# Altium PCB Quadrotor.PcbDoc
Units mil, origin at the board's own origin, x right, y up, seen from the top; angles counter-clockwise.
Board outline 3300.89 x 3300.89 mil, 2 copper layers (Top Layer, Bottom Layer); 82 components, 73 nets, 358 pads, 124 vias.
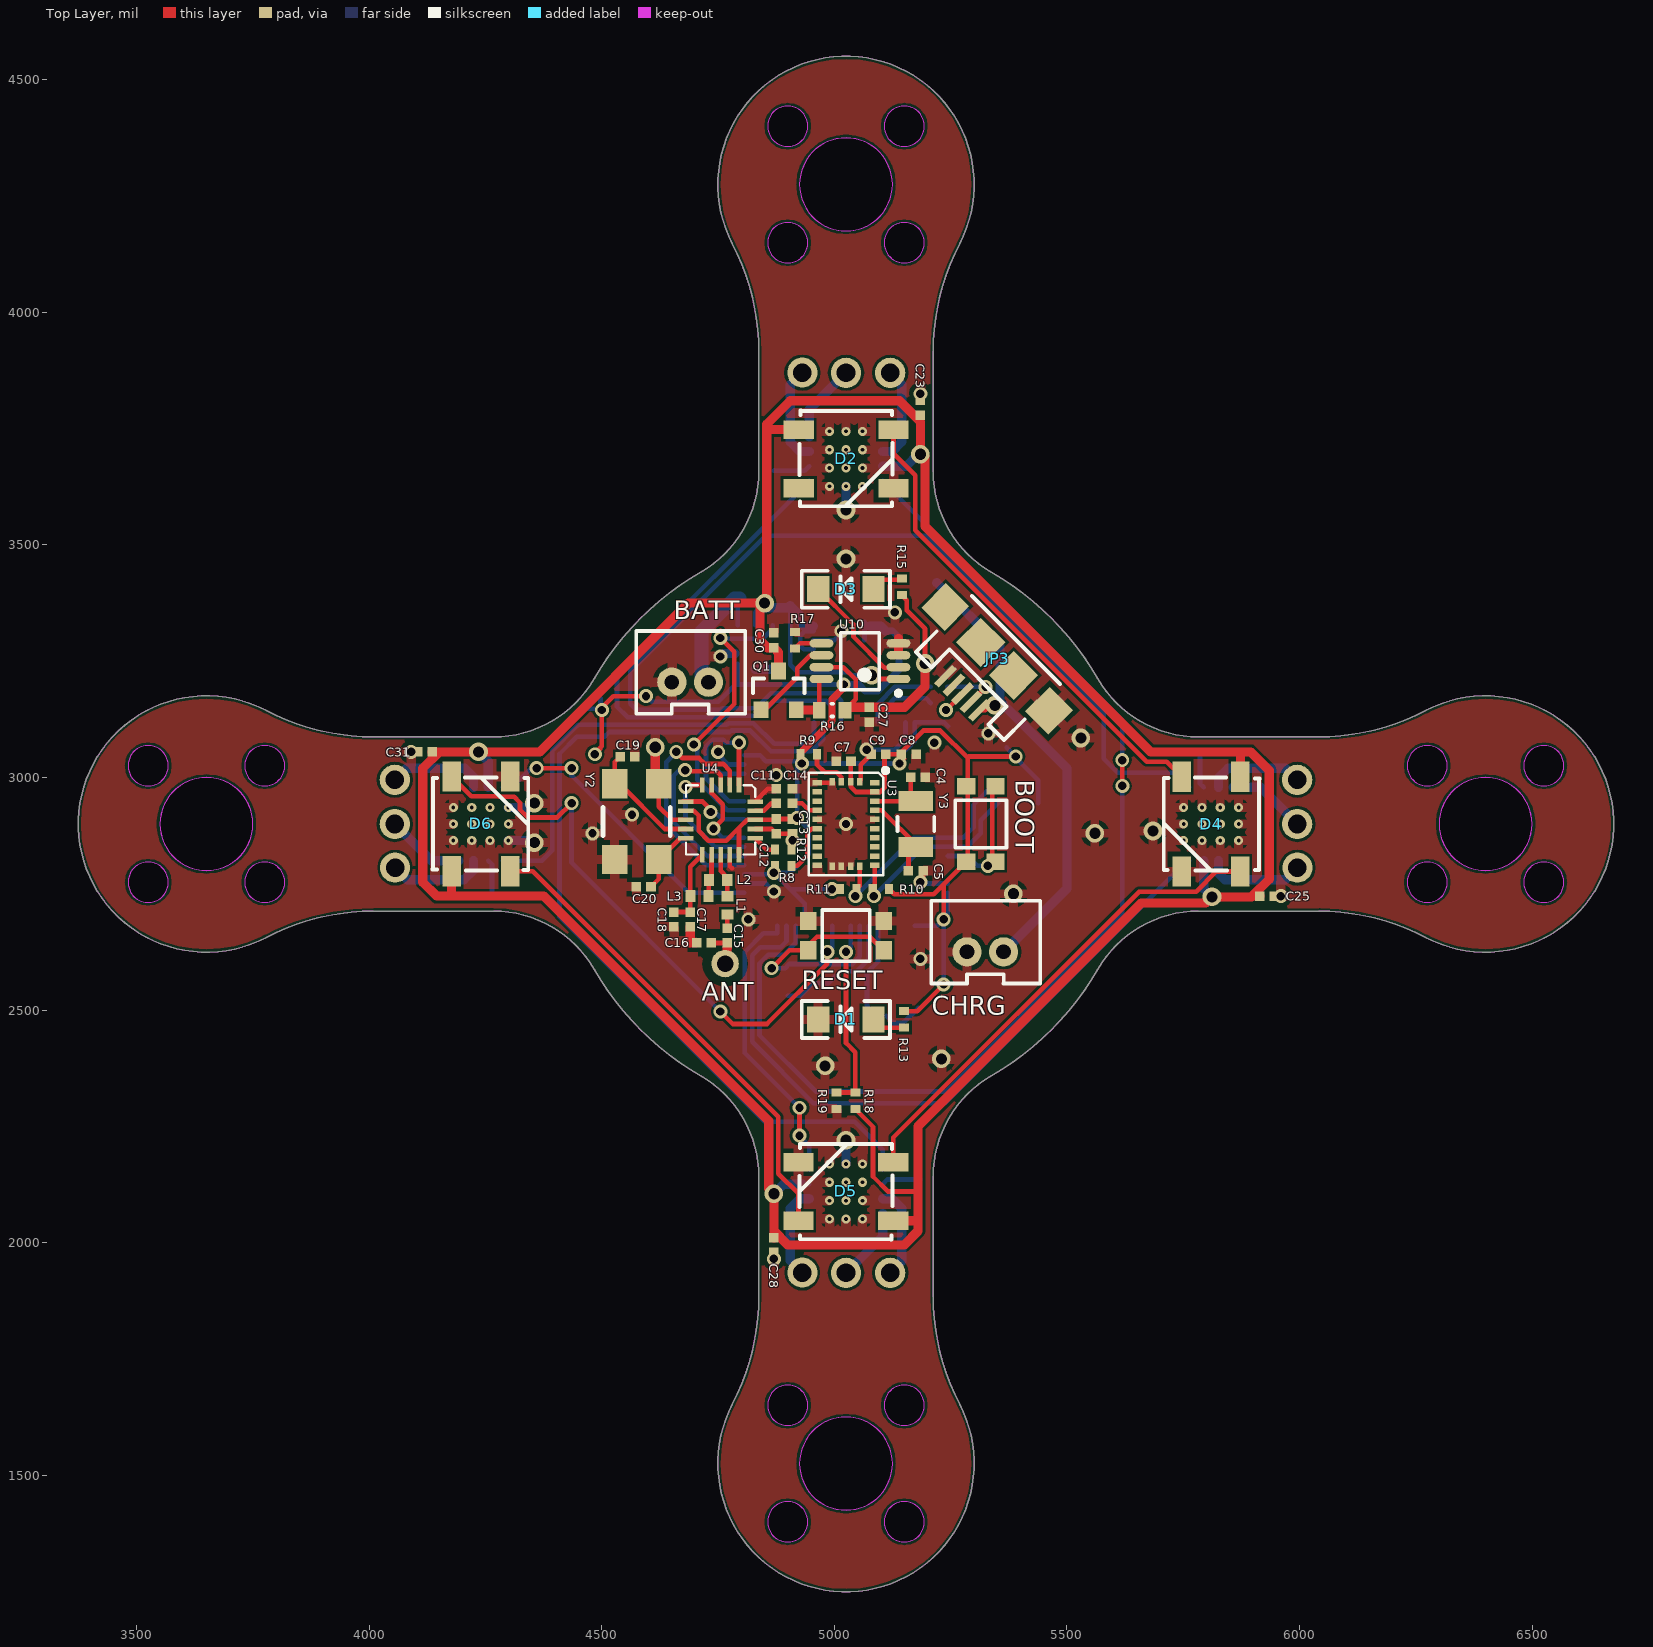
[diagram p0: Top Layer view]
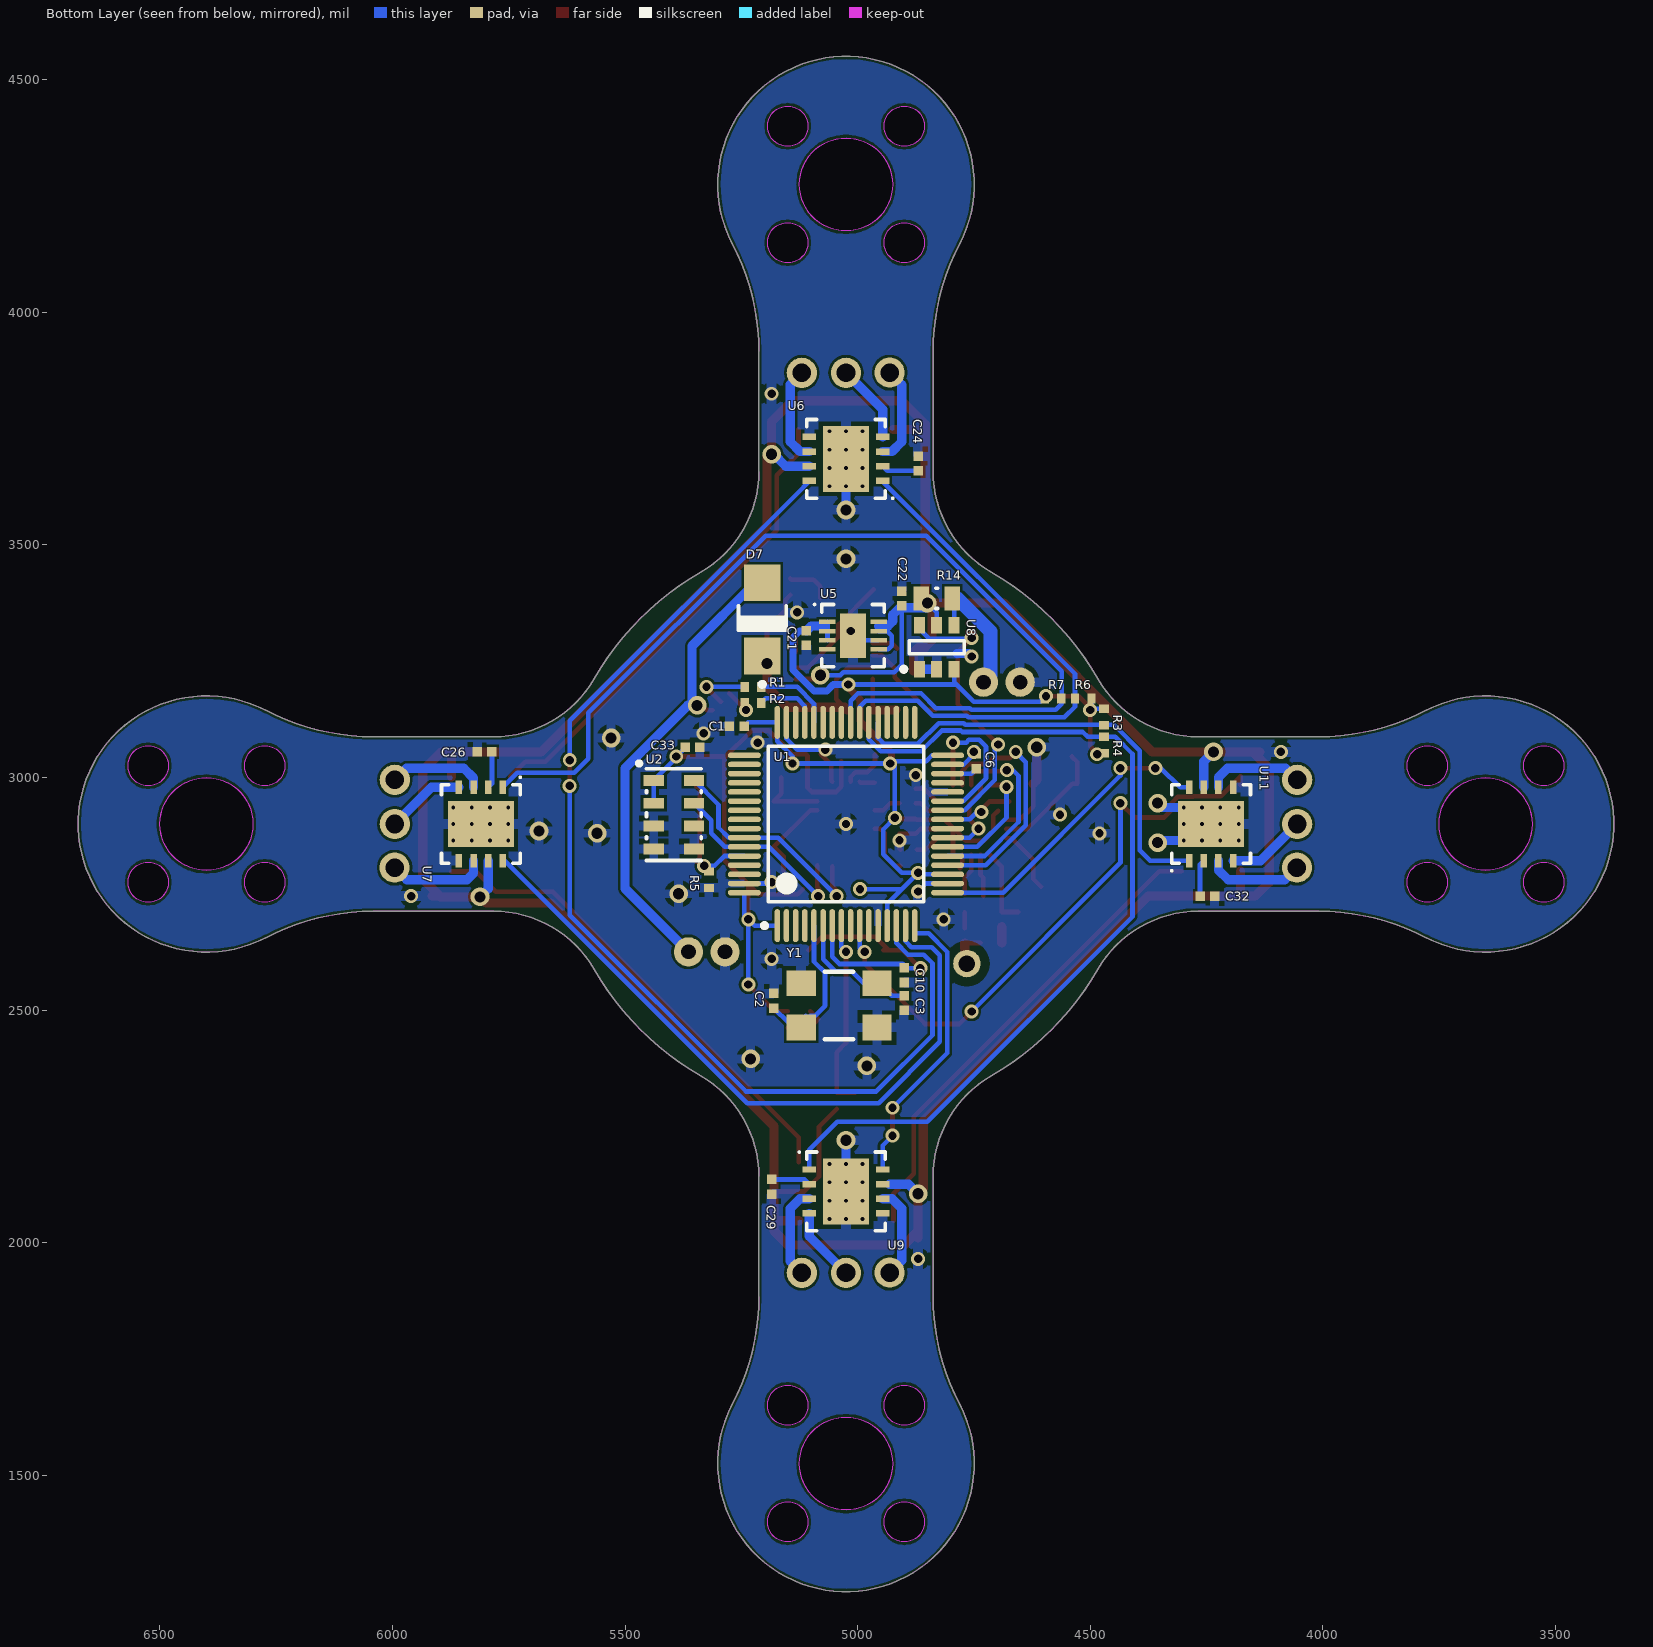
[diagram p1: Bottom Layer view, seen from below]

## Layer stack, top to bottom
Top Solder: solder mask 0.4, Solder Resist, Dk 3.5
Top Layer: signal copper 1.4
Dielectric 1: dielectric 12.6, FR-4, Dk 4.8
Bottom Layer: signal copper 1.4
Bottom Solder: solder mask 0.4, Solder Resist, Dk 3.5

## Board outline
4267.23,2712.5 cw(c4267.23,2462.5) 4483.73,2587.5 ccw(c5025,2900) 4712.5,2358.73 cw(c4587.5,2142.23) 4837.5,2142.23 4837.5,1884 cw(c4337.5,1884) 4780.71,1652.57 ccw(c5025,1525) 5269.29,1652.57 cw(c5712.5,1884) 5212.5,1884 5212.5,2142.23 cw(c5462.5,2142.23) 5337.5,2358.73 ccw(c5025,2900) 5566.27,2587.5 cw(c5782.77,2462.5) 5782.77,2712.5 6041,2712.5 cw(c6041,2212.5) 6272.43,2655.71 ccw(c6400,2900) 6272.43,3144.29 cw(c6041,3587.5) 6041,3087.5 5782.77,3087.5 cw(c5782.77,3337.5) 5566.27,3212.5 ccw(c5025,2900) 5337.5,3441.27 cw(c5462.5,3657.77) 5212.5,3657.77 5212.5,3916 cw(c5712.5,3916) 5269.29,4147.43 ccw(c5025,4275) 4780.71,4147.43 cw(c4337.5,3916) 4837.5,3916 4837.5,3657.77 cw(c4587.5,3657.77) 4712.5,3441.27 ccw(c5025,2900) 4483.73,3212.5 cw(c4267.23,3337.5) 4267.23,3087.5 4009,3087.5 cw(c4009,3587.5) 3777.57,3144.29 ccw(c3650,2900) 3777.57,2655.71 cw(c4009,2212.5) 4009,2712.5
cut-out: 3550,2900 ccw(c3650,2900) 3650,2800 ccw(c3650,2900) 3750,2900 ccw(c3650,2900) 3650,3000 ccw(c3650,2900)
cut-out: 3731.97,2774.73 ccw(c3775.27,2774.73) 3775.27,2731.42 ccw(c3775.27,2774.73) 3818.58,2774.73 ccw(c3775.27,2774.73) 3775.27,2818.03 ccw(c3775.27,2774.73)
cut-out: 3481.42,2774.73 ccw(c3524.73,2774.73) 3524.73,2731.42 ccw(c3524.73,2774.73) 3568.03,2774.73 ccw(c3524.73,2774.73) 3524.73,2818.03 ccw(c3524.73,2774.73)
cut-out: 3731.97,3025.27 ccw(c3775.27,3025.27) 3775.27,2981.97 ccw(c3775.27,3025.27) 3818.58,3025.27 ccw(c3775.27,3025.27) 3775.27,3068.58 ccw(c3775.27,3025.27)
cut-out: 3481.42,3025.27 ccw(c3524.73,3025.27) 3524.73,2981.97 ccw(c3524.73,3025.27) 3568.03,3025.27 ccw(c3524.73,3025.27) 3524.73,3068.58 ccw(c3524.73,3025.27)
cut-out: 4925,1525 ccw(c5025,1525) 5025,1425 ccw(c5025,1525) 5125,1525 ccw(c5025,1525) 5025,1625 ccw(c5025,1525)
cut-out: 4856.42,1399.73 ccw(c4899.73,1399.73) 4899.73,1356.42 ccw(c4899.73,1399.73) 4943.03,1399.73 ccw(c4899.73,1399.73) 4899.73,1443.03 ccw(c4899.73,1399.73)
cut-out: 5106.97,1399.73 ccw(c5150.27,1399.73) 5150.27,1356.42 ccw(c5150.27,1399.73) 5193.58,1399.73 ccw(c5150.27,1399.73) 5150.27,1443.03 ccw(c5150.27,1399.73)
cut-out: 4856.42,1650.27 ccw(c4899.73,1650.27) 4899.73,1606.97 ccw(c4899.73,1650.27) 4943.03,1650.27 ccw(c4899.73,1650.27) 4899.73,1693.58 ccw(c4899.73,1650.27)
cut-out: 5106.97,1650.27 ccw(c5150.27,1650.27) 5150.27,1606.97 ccw(c5150.27,1650.27) 5193.58,1650.27 ccw(c5150.27,1650.27) 5150.27,1693.58 ccw(c5150.27,1650.27)
cut-out: 6300,2900 ccw(c6400,2900) 6400,2800 ccw(c6400,2900) 6500,2900 ccw(c6400,2900) 6400,3000 ccw(c6400,2900)
cut-out: 6231.42,2774.73 ccw(c6274.73,2774.73) 6274.73,2731.42 ccw(c6274.73,2774.73) 6318.03,2774.73 ccw(c6274.73,2774.73) 6274.73,2818.03 ccw(c6274.73,2774.73)
cut-out: 6481.97,2774.73 ccw(c6525.27,2774.73) 6525.27,2731.42 ccw(c6525.27,2774.73) 6568.58,2774.73 ccw(c6525.27,2774.73) 6525.27,2818.03 ccw(c6525.27,2774.73)
cut-out: 6231.42,3025.27 ccw(c6274.73,3025.27) 6274.73,2981.97 ccw(c6274.73,3025.27) 6318.03,3025.27 ccw(c6274.73,3025.27) 6274.73,3068.58 ccw(c6274.73,3025.27)
cut-out: 6481.97,3025.27 ccw(c6525.27,3025.27) 6525.27,2981.97 ccw(c6525.27,3025.27) 6568.58,3025.27 ccw(c6525.27,3025.27) 6525.27,3068.58 ccw(c6525.27,3025.27)
cut-out: 4925,4275 ccw(c5025,4275) 5025,4175 ccw(c5025,4275) 5125,4275 ccw(c5025,4275) 5025,4375 ccw(c5025,4275)
cut-out: 5106.97,4149.73 ccw(c5150.27,4149.73) 5150.27,4106.42 ccw(c5150.27,4149.73) 5193.58,4149.73 ccw(c5150.27,4149.73) 5150.27,4193.03 ccw(c5150.27,4149.73)
cut-out: 4856.42,4149.73 ccw(c4899.73,4149.73) 4899.73,4106.42 ccw(c4899.73,4149.73) 4943.03,4149.73 ccw(c4899.73,4149.73) 4899.73,4193.03 ccw(c4899.73,4149.73)
cut-out: 4856.42,4400.27 ccw(c4899.73,4400.27) 4899.73,4356.97 ccw(c4899.73,4400.27) 4943.03,4400.27 ccw(c4899.73,4400.27) 4899.73,4443.58 ccw(c4899.73,4400.27)
cut-out: 5106.97,4400.27 ccw(c5150.27,4400.27) 5150.27,4356.97 ccw(c5150.27,4400.27) 5193.58,4400.27 ccw(c5150.27,4400.27) 5150.27,4443.58 ccw(c5150.27,4400.27)

## Design rules (kind name [scope] priority, off if disabled: settings)
Clearance Clearance_2 [InNet('ANTENNA') vs (InNet('GND') AND InPolygon)] p1: gap=19.68
Clearance Clearance_1 [All] p2: gap=5.91
Clearance [InPolygon] p3: gap=7.87
PolygonConnect [All] p1: connectstyle=Relief reliefconductorwidth=20 reliefentries=4 polygonreliefangle="90 Angle" airgapwidth=10
RoutingVias [All] p1: holewidth=24 width=40 viastyle="Through Hole" minholewidth=18 minwidth=30 maxholewidth=28 maxwidth=50
SolderMaskExpansion [All] p1: expansion=4
Width [All] p1: maxlimit=50 minlimit=10 preferedwidth=10 minimp=50.000000 maximp=50.000000 favimp=50.000000
30 further rules are at their usual default settings.

## Classes and differential pairs
component class Quadrotor: BATT CHRG JP3
component class U_Logic: C1 C2 C3 C4 C5 C6 C7 C8 C9 C10 C11 C12 C13 C14 C15 C16 C17 C18 C19 C20 C33 D2 D4 D5 D6 L1 L2 L3 R1 R2 R3 R4 R5 R6 R7 R8 R9 R10 R11 R12 R18 R19 SW1 SW2 U1 U2 U3 U4 Y1 Y2 Y3
component class U_Power: C21 C22 C23 C24 C25 C26 C27 C28 C29 C30 C31 C32 D1 D3 D7 Q1 R13 R14 R15 R16 R17 U5 U6 U7 U8 U9 U10 U11

## Components (designator, comment, footprint, x,y, rotation, side; value= is the part's Value field where it differs from the comment)
BATT "" JST-2-PTH-VERT 4690,3205 r0 top (schematic designator JP1)
BOOT "" SWITCH 5315,2900 r270 top (schematic designator SW1)
C1 "4.7uF" CAPC0402(1005)60_L 5260,3110 r180 bottom
C2 "15pF" CAPC0402(1005)60_L 5180,2520 r90 bottom
C3 "15pF" CAPC0402(1005)60_L 4900,2515 r270 bottom
C4 "22pF" CAPC0402(1005)60_L 5180,3000 r180 top
C5 "22pF" CAPC0402(1005)60_L 5175,2800 r180 top
C6 "4.7uF" CAPC0402(1005)60_L 4745,3035 r270 bottom
C7 "100nF" CAPC0402(1005)60_L 5020,3035 r0 top
C8 "120nF" CAPC0402(1005)60_L 5160,3050 r180 top
C9 "6.8nF" CAPC0402(1005)60_L 5095,3050 r0 top
C10 "100nF" CAPC0402(1005)60_L 4900,2575 r90 bottom
C11 "33nF" CAPC0402(1005)60_L 4875,2960 r270 top
C12 "10nF" CAPC0402(1005)60_L 4875,2895 r90 top
C13 "1nF" CAPC0402(1005)60_L 4910,2895 r90 top
C14 "100nF" CAPC0402(1005)60_L 4910,2960 r270 top
C15 "1.5pF" CAPC0402(1005)60_L 4770,2660 r270 top
C16 "1pF" CAPC0402(1005)60_L 4720,2645 r0 top
C17 "2.2nF" CAPC0402(1005)60_L 4690,2695 r90 top
C18 "4.7pF" CAPC0402(1005)60_L 4655,2695 r90 top
C19 "15pF" CAPC0402(1005)60_L 4555,3045 r180 top
C20 "15pF" CAPC0402(1005)60_L 4590,2765 r0 top
C21 "4.7uF" CAPC0402(1005)60_L 5110,3300 r90 bottom
C22 "4.7uF" CAPC0402(1005)60_L 4905,3385 r270 bottom
C23 "4.7uF" CAPC0402(1005)60_L 5185,3795 r270 top
C24 "4.7uF" CAPC0402(1005)60_L 4870,3675 r90 bottom
C25 "4.7uF" CAPC0402(1005)60_L 5930,2745 r180 top
C26 "4.7uF" CAPC0402(1005)60_L 5801.89,3055.65 r0 bottom
C27 "2.2uF" CAPC0402(1005)60_L 5075,3135 r90 top
C28 "4.7uF" CAPC0402(1005)60_L 4870,1995 r90 top
C29 "4.7uF" CAPC0402(1005)60_L 5185,2120 r270 bottom
C30 "10uF" CAPC0402(1005)60_L 4870,3295 r270 top
C31 "4.7uF" CAPC0402(1005)60_L 4120,3055 r0 top
C32 "4.7uF" CAPC0402(1005)60_L 4248.11,2744.35 r180 bottom
C33 "0.1uF" CAPC0402(1005)60_L 5355,3065 r0 bottom
CHRG "" JST-2-PTH-VERT 5324.37,2625 r0 top (schematic designator JP2)
D1 "LED-BLUE" LED-1206 5025,2480 r180 top
D2 "WS2812B" WS2812B 5025,3685 r0 top
D3 "LED-GREEN" LED-1206 5025,3405 r180 top
D4 "WS2812B" WS2812B 5810,2900 r270 top
D5 "WS2812B" WS2812B 5025,2110 r180 top
D6 "WS2812B" WS2812B 4240,2900 r90 top
D7 "MBRA210LT3G" ONSC-SMA-2-403D-02_F_V 5205,3340 r90 bottom
JP3 "USB" USB-MICROB 5350,3255 r135 top
L1 "3.9nH" INDC0402(1005)_N 4770,2725 r270 top
L2 "8.2nH" INDC0402(1005)_N 4750,2780 r180 top
L3 "2.7nH" INDC0402(1005)_N 4710,2745 r180 top
Q1 "MOSFET-P" SOT23-3 4880,3185 r0 top
R1 "22R" RESC0402(1005)_L 5225,3195 r180 bottom
R2 "22R" RESC0402(1005)_L 5225,3160 r180 bottom
R3 "10K" RESC0402(1005)_L 4470,3130 r90 bottom
R4 "10K" RESC0402(1005)_L 4470,3070 r270 bottom
R5 "10K" RESC0402(1005)_L 5320,2780 r90 bottom
R6 "10K" RESC0402(1005)_L 4515,3170 r0 bottom
R7 "10K" RESC0402(1005)_L 4580,3170 r180 bottom
R8 "10K" RESC0402(1005)_L 4890,2810 r180 top
R9 "10K" RESC0402(1005)_L 4945,3050 r180 top
R10 "10K" RESC0402(1005)_L 5100,2760 r180 top
R11 "10K" RESC0402(1005)_L 5030,2760 r0 top
R12 "22K" RESC0402(1005)_L 4890,2845 r180 top
R13 "10R" RESC0402(1005)_L 5150,2480 r90 top
R14 "0.006R" RESC0805(2012)_L 4830,3385 r180 bottom
R15 "91R" RESC0402(1005)_L 5145,3410 r270 top
R16 "0.1R" RESC0603(1608)_L 4995,3145 r0 top
R17 "19K6" RESC0402(1005)_L 4915,3295 r270 top
R18 "5K1" RESC0402(1005)_L 5045,2305 r270 top
R19 "10K" RESC0402(1005)_L 5005,2305 r90 top
RESET "" SWITCH 5025,2660 r180 top (schematic designator SW2)
U1 "STMF446" STM-LQFP64_N 5025,2900 r90 bottom
U2 "MS5611" MS5611 5395,2920 r180 bottom
U3 "BNO055" LGA28R50P4X10_380X520X100 5025,2900 r270 top
U4 "" QFN20 4755,2910 r270 top
U5 "ADM7171" SON50P300X85_HS-9N 5010,3305 r180 bottom
U6 "MCP8063" DFN8 5025,3685 r0 bottom
U7 "MCP8063" DFN8 5810,2900 r270 bottom
U8 "MAX4173" MAXM-U6+1_L 4830,3280 r90 bottom
U9 "MCP8063" DFN8 5025,2110 r180 bottom
U10 "LTC1731" LT-MS8-8_L 5055,3250 r180 top
U11 "MCP8063" DFN8 4240,2900 r90 bottom
Y1 "" ABRA-ABM3B-4_V 5040,2510 r180 bottom
Y2 "" ABRA-ABM3B-4_V 4575,2905 r270 top
Y3 "ABS07" ABS07 5175,2900 r270 top

## Footprints (in the part's own frame and the unit in brackets; to place one, negate y for a bottom-side part, rotate by r counter-clockwise, add the part's x,y. Pads: shape width x height; smd on the part's side, far side on the other; paste and mask are expansions set on the pad)
ABRA-ABM3B-4_V [mil] "SMT Crystal, 4-Leads, Body 5.2x3.4mm"
  rect 63x55 smd: 1(-81.5,-47.5) 2(-81.5,47.5) 2(81.5,-47.5) 3(81.5,47.5)
  silkscreen extent -31,-72 31,72, body extent -114,-52 113,51, height 39
ABS07 [mm]
  rect 1.1x1.9 smd: 1(-1.25,0) 2(1.25,0)
  silkscreen extent -0.4,-1 0.4,1
CAPC0402(1005)60_L [mm] "Chip Capacitor, Body 1.0x0.5mm, Height 0.6mm, IPC High Density"
  rect 0.52x0.52 smd: 1(-0.4,0) 2(0.4,0)
  body extent -0.55,-0.3 0.55,0.3, height 0.6
DFN8 [mm] "SON, 8-Leads, Body 4.00x4.00mm, Pitch 0.80mm, Thermal Pad 3.50x2.58mm, IPC Medium Density"
  rect 0.75x0.35 smd: 1(-2,1.2) 2(-2,0.4) 3(-2,-0.4) 4(-2,-1.2) 5(2,-1.2) 6(2,-0.4) 7(2,0.4) 8(2,1.2)
  rect 2.5x3.6 smd paste-1.29: 9(0,0)
  silkscreen extent -2.6,-2.15 2.15,2.2, body extent -2,-2 2,2, height 0.85
INDC0402(1005)_N [mm] "Chip Inductor Body 1.0x0.5mm, IPC Medium Density"
  rect 0.55x0.65 smd: 1(-0.5,0) 2(0.5,0)
  body extent -0.52,-0.27 0.53,0.28, height 0.4
JST-2-PTH-VERT [mil]
  round 63 hole 31.5: 1(-39.37,0) 2(39.37,0)
  silkscreen extent -116,-68 118,110, body extent -116,-67 116,110, height 236
LED-1206 [mil]
  rect 48x56 smd: A(-59.06,0) C(60,0)
  silkscreen extent -94,-39 95,40, body extent -63,-31 63,31, height 43
LGA28R50P4X10_380X520X100 [mm]
  rect 0.3x0.525 smd mask+0.076: 1(-2.25,1.562) 6(-2.25,-1.562) 7(-1.75,-1.562) 8(-1.25,-1.562) 9(-0.75,-1.562) 10(-0.25,-1.562) 11(0.25,-1.562) 12(0.75,-1.562) 13(1.25,-1.562) 14(1.75,-1.562) 15(2.25,-1.562) 20(2.25,1.562) 21(1.75,1.562) 22(1.25,1.562) 23(0.75,1.562) 24(0.25,1.562) 25(-0.25,1.562) 26(-0.75,1.562) 27(-1.25,1.562) 28(-1.75,1.562)
  rect 0.425x0.3 smd mask+0.076: 2(-2.312,0.75) 3(-2.312,0.25) 4(-2.312,-0.25) 5(-2.312,-0.75) 16(2.312,-0.75) 17(2.312,-0.25) 18(2.312,0.25) 19(2.312,0.75)
  silkscreen extent -3.02,-2.03 2.79,2.26, body extent -2.5,-1.8 2.5,1.8, height 0.6
LT-MS8-8_L [mm] "SOP, 8-Leads, Body 3.1x3.1mm, Pitch 0.65mm, IPC High Density"
  oval 1.3x0.45 smd: 1(-2.1,0.975) 2(-2.1,0.325) 3(-2.1,-0.325) 4(-2.1,-0.975) 5(2.1,-0.975) 6(2.1,-0.325) 7(2.1,0.325) 8(2.1,0.975)
  silkscreen extent -2.23,-1.55 1.05,1.87, body extent -1.55,-1.55 1.55,1.55, height 1.1
MAXM-U6+1_L [mm] "SOT23, 6-Leads, Body 2.9x1.625mm, Pitch 0.95mm, IPC High Density"
  rect 0.9x0.6 smd: 1(-1.2,0.95) 2(-1.2,0) 3(-1.2,-0.95) 4(1.2,-0.95) 5(1.2,0) 6(1.2,0.95)
  silkscreen extent -1.32,-1.5 0.35,1.93, body extent -0.87,-1.5 0.87,1.5, height 1.45
MS5611 [mm]
  rect 1.1x0.6 smd: 1(-1.1,1.875) 2(-1.1,0.625) 3(-1.1,-0.625) 4(-1.1,-1.875) 5(1.1,-1.875) 6(1.1,-0.625) 7(1.1,0.625) 8(1.1,1.875)
  silkscreen extent -2,-2.5 1.5,2.9
ONSC-SMA-2-403D-02_F_V [mm] "Molded, 2-Leads, Body 4.32x2.6mm"
  rect 2x2 smd: 1(-2,0) 2(2,0)
  silkscreen extent -3.67,-1.3 0.74,1.3, body extent -2.16,-1.3 2.16,1.3, height 2.2
QFN20 [mm]
  rect 0.84x0.25 smd: 1(-1.876,1.016) 2(-1.876,0.516) 3(-1.876,0.016) 4(-1.876,-0.484) 5(-1.876,-0.984) 11(1.931,-0.984) 12(1.931,-0.484) 13(1.931,0.016) 14(1.931,0.516) 15(1.931,1.016)
  rect 0.25x0.84 smd: 6(-0.972,-1.887) 7(-0.472,-1.887) 8(0.028,-1.887) 9(0.528,-1.887) 10(1.028,-1.887) 16(1.028,1.894) 17(0.528,1.894) 18(0.028,1.894) 19(-0.472,1.894) 20(-0.972,1.894)
  Top Layer lines w0.254: -0.972,-2.039 -0.972,-1.887
  silkscreen extent -1.87,-1.88 1.92,1.91, body extent -1.5,-1.5 1.5,1.5, height 0.62
RESC0402(1005)_L [mm] "Chip Resistor, Body 1.0x0.5mm, IPC High Density"
  rect 0.45x0.55 smd: 1(-0.45,0) 2(0.45,0)
  body extent -0.52,-0.27 0.53,0.28, height 0.4
RESC0603(1608)_L [mm] "Chip Resistor, Body 1.6x0.8mm, IPC High Density"
  rect 0.7x0.9 smd: 1(-0.7,0) 2(0.7,0)
  silkscreen extent -0.05,-0.35 0.05,0.35, body extent -0.85,-0.47 0.85,0.47, height 0.6
RESC0805(2012)_L [mm] "Chip Resistor, Body 2.0x1.3mm, IPC High Density"
  rect 0.85x1.3 smd: 1(-0.85,0) 2(0.85,0)
  silkscreen extent -0.05,-0.55 0.05,0.55, body extent -1.1,-0.67 1.1,0.68, height 0.7
SON50P300X85_HS-9N [mm] "SON, 8-Leads, Body 3.00x3.00mm, Pitch 0.50mm, Thermal Pad 2.44x1.49mm, IPC Medium Density"
  rect 0.9x0.25 smd: 1(-1.395,0.75) 2(-1.395,0.25) 3(-1.395,-0.25) 4(-1.395,-0.75) 5(1.395,-0.75) 6(1.395,-0.25) 7(1.395,0.25) 8(1.395,0.75)
  rect 1.4x2.44 smd: 9(0,0)
  silkscreen extent -2.15,-1.7 1.7,1.75, body extent -1.55,-1.55 1.55,1.55, height 0.85
SOT23-3 [mil]
  rect 32x36 smd: 1(-37.4,-39.37) 2(0,44) 3(38,-39.37)
  silkscreen extent -55,-4 56,28
STM-LQFP64_N [mm] "Thin QFP, 64-Leads, Body 10x10mm, Pitch 0.5mm, IPC Medium Density"
  oval 1.8x0.3 smd: 1(-5.55,3.75) 2(-5.55,3.25) 3(-5.55,2.75) 4(-5.55,2.25) 5(-5.55,1.75) 6(-5.55,1.25) 7(-5.55,0.75) 8(-5.55,0.25) 9(-5.55,-0.25) 10(-5.55,-0.75) 11(-5.55,-1.25) 12(-5.55,-1.75) 13(-5.55,-2.25) 14(-5.55,-2.75) 15(-5.55,-3.25) 16(-5.55,-3.75) 33(5.55,-3.75) 34(5.55,-3.25) 35(5.55,-2.75) 36(5.55,-2.25) 37(5.55,-1.75) 38(5.55,-1.25) 39(5.55,-0.75) 40(5.55,-0.25) 41(5.55,0.25) 42(5.55,0.75) 43(5.55,1.25) 44(5.55,1.75) 45(5.55,2.25) 46(5.55,2.75) 47(5.55,3.25) 48(5.55,3.75)
  oval 0.3x1.8 smd: 17(-3.75,-5.55) 18(-3.25,-5.55) 19(-2.75,-5.55) 20(-2.25,-5.55) 21(-1.75,-5.55) 22(-1.25,-5.55) 23(-0.75,-5.55) 24(-0.25,-5.55) 25(0.25,-5.55) 26(0.75,-5.55) 27(1.25,-5.55) 28(1.75,-5.55) 29(2.25,-5.55) 30(2.75,-5.55) 31(3.25,-5.55) 32(3.75,-5.55) 49(3.75,5.55) 50(3.25,5.55) 51(2.75,5.55) 52(2.25,5.55) 53(1.75,5.55) 54(1.25,5.55) 55(0.75,5.55) 56(0.25,5.55) 57(-0.25,5.55) 58(-0.75,5.55) 59(-1.25,5.55) 60(-1.75,5.55) 61(-2.25,5.55) 62(-2.75,5.55) 63(-3.25,5.55) 64(-3.75,5.55)
  silkscreen extent -5.67,-4.25 4.25,4.58, body extent -6.07,-6.07 6.07,6.07, height 1.62
SWITCH [mm]
  rect 0.9x1 smd: 1(-2.05,0.8) 2(2.05,0.8) 3(-2.05,-0.8) 4(2.05,-0.8)
  silkscreen extent -1.3,-1.4 1.3,1.4, body extent -2.3,-1.4 2.3,1.4, height 1.9
USB-MICROB [mil]
  rect 14x56 smd: D+(0,105) D-(-25.59,105) GND(52,105) ID(26,105) VBUS(-51.18,105)
  rect 71x75 smd: MT1(-157.48,0) MT2(158,0)
  rect 75x75 smd: P$1(-50,0) P$2(50,0)
  silkscreen extent -134,-57 134,113, body extent -156,-80 157,134, height 108
WS2812B [mil]
  rect 65x40 smd: 1(-101.46,63) 2(-101.46,-62.99) 3(102,-62.99) 4(102,63)
  silkscreen extent -100,-102 100,104, body extent -105,-97 105,97, height 59

## Part data
BATT CHRG: library part JST_2_RIGHT
BOOT RESET: library part DIPT-DTSM-6, "Switch, SPNO Push Button SMD"
C1 C6 C21 C22 C23 C24 C25 C26 C28 C29 C31 C32: library part CMP-1034-02136-1, "CAP 4.7uF 6.3V ±10% 0402 (1005 Metric) Thickness 0.6mm SMD"
C2 C3: library part CMP-1034-00804-1, "CAP 15pF 25V ±0.25pF 0402 (1005 Metric) Thickness 0.6mm SMD"
C4 C5: library part CMP-1034-00911-1, "CAP 22pF 25V ±10% 0402 (1005 Metric) Thickness 0.6mm SMD"
C7 C8 C10 C14 C33: library part CMP-1034-02060-1, "CAP 100nF 6.3V ±5% 0402 (1005 Metric) Thickness 0.6mm SMD"
C9: library part CMP-1034-01836-1, "CAP 6.8nF 6.3V ±5% 0402 (1005 Metric) Thickness 0.6mm SMD"
C11: library part CMP-1034-01977-1, "CAP 33nF 6.3V ±10% 0402 (1005 Metric) Thickness 0.6mm SMD"
C12: library part CMP-1034-01867-1, "CAP 10nF 6.3V ±5% 0402 (1005 Metric) Thickness 0.6mm SMD"
C13: library part CMP-1034-01609-1, "CAP 1nF 6.3V ±5% 0402 (1005 Metric) Thickness 0.6mm SMD"
C15: library part CMP-1034-00110-1, "CAP 1.5pF 25V ±0.5pF 0402 (1005 Metric) Thickness 0.6mm SMD"
C16: library part CMP-1034-00055-1, "CAP 1pF 25V ±0.5pF 0402 (1005 Metric) Thickness 0.6mm SMD"
C17: library part CMP-1034-01722-1, "CAP 2.2nF 6.3V ±5% 0402 (1005 Metric) Thickness 0.6mm SMD"
C18: library part CMP-1034-00362-1, "CAP 4.7pF 25V ±0.1pF 0402 (1005 Metric) Thickness 0.6mm SMD"
C19 C20: library part CMP-1034-00809-1, "CAP 15pF 25V ±10% 0402 (1005 Metric) Thickness 0.6mm SMD"
C27: library part CMP-1034-02125-1, "CAP 2.2uF 6.3V ±10% 0402 (1005 Metric) Thickness 0.6mm SMD"
C30: library part CMP-1034-02138-1, "CAP 10uF 6.3V ±20% 0402 (1005 Metric) Thickness 0.6mm SMD"
D1: library part LED-BLUE1206
D3: library part LED-GREEN1206
D7: library part CMP-1055-00309-1, "Schottky Power Rectifier, 2-Pin SMA, Pb-Free, Tape and Reel"
JP3: library part USB_MICROB_PLUG-SMT
L1 L2 L3: library part INDC0402, "Inductor"
Q1: "P-Channel MOSFET"
R1 R2: library part CMP-1011-00034-1, "22R 0.063W 5% 0402 (1005 Metric)  SMD"
R3 R4 R5 R6 R7 R8 R9 R10 R11 R19: library part CMP-1011-00098-1, "10K 0.063W 5% 0402 (1005 Metric)  SMD"
R12: library part CMP-1011-00106-1, "22K 0.063W 5% 0402 (1005 Metric)  SMD"
R13: library part CMP-1011-00026-1, "10R 0.063W 5% 0402 (1005 Metric)  SMD"
R14: library part CMP-1013-00001-1, "Jumper 0805 (2012 Metric)"
R15: library part CMP-1011-00049-1, "91R 0.063W 5% 0402 (1005 Metric)  SMD"
R16: library part CMP-1012-00002-1, "1R 0.1W 5% 0603 (1608 Metric)  SMD"
R17: library part CMP-1011-00105-1, "20K 0.063W 5% 0402 (1005 Metric)  SMD"
R18: library part CMP-1011-00091-1, "5K1 0.063W 5% 0402 (1005 Metric)  SMD"
U1: library part MC-ARM-STM32F4X5-SQ64
U4: library part NRF24L01+
U6 U7 U9 U11: "3-Phase Brushless DC Sinusoidal Sensorless Fan Motor Driver, MOSFET Output, 2 to 14 V, 8-pin SOP (SE8), Tube"
U8: library part CMP-0252-00331-1, "Voltage-Output, High-Side Current-Sense Amplifier, 50 V / V Gain, -40 to 85 degC, 6-Pin SOT23 (U6+1), Pb-Free, Tape and Reel"
U10: library part CMP-0471-00369-1, "Linear Charger with AC Adapter Detection, 4.5 to 12 V Vin, 8-pin SOP (MS8-8), -40 to 85 degC, Pb-Free, Tape and Reel"
Y1 Y2: library part ABRA-ABM3B-4

## Free pads (board coordinates)
  round 59.06 hole 35.43: 2(4765,2600)
  round 65 hole 40: ""(4055,2900) ""(4055,2995) ""(4055.49,2806.21) ""(4931.21,1935.49) ""(4931.21,3870.49) ""(5025,1935) ""(5025,3870) ""(5120,1935) ""(5120,3870) ""(5995,2900) ""(5995,2995) ""(5995.49,2806.21)

## Via types
v1: diameter 30, hole 18, Top Layer to Bottom Layer, 56 vias
v2: diameter 19.68, hole 7.87, Top Layer to Bottom Layer, 48 vias
v3: diameter 40, hole 24, Top Layer to Bottom Layer, 20 vias

## Nets (pads, with @x,y where several pads share a name; then routed paths per layer and width w, separated by ;. In a path a pad name is that pad's centre, name@x,y a point inside that pad or via, vN(x,y) a via of type N, cw(c..) or ccw(c..) an arc to the next point about the centre after c; other vN are vias at no path point)
ANTENNA: C15.2 C16.2 pad.2 | length 79.2
  Top Layer w10: C16.2 4736.5,2644.25 C15.2
  Top Layer w20: pad.2 4770,2635 C15.2
B+: BATT.2 R14.2 U8.4 | length 279.8
  Bottom Layer w10: U8.4 R14.2@4792.6,3380
  Bottom Layer w20: BATT.2@4714.37,3220 BATT.2
  Bottom Layer w30: BATT.2@4714.37,3220 4714.37,3314.37 4785,3385 R14.2
C+: CHRG.2 D7.2 JP3.VBUS | length 1028.4
  Top Layer w10: JP3.VBUS 5324.56,3144.56 5340,3160 v3(5345,3155)
  Bottom Layer w20: D7.2@5220,3418.74 5355.91,3282.83 5355.91,3165.91 v3(5345,3155) 5365,3155 5500,3020 5500,2761.26 CHRG.2
CE: U1.27 U4.1 | length 341.8
  Top Layer w10: U4.1 v1(4795,3075)
  Bottom Layer w10: v1(4795,3075) 4766.64,3075 4760.73,3080.91 4738.41,3080.91 4723.86,3066.35 4723.86,2998.23 4772.88,2949.21 U1.27
CSN: U1.20 U4.2 | length 533.2
  Top Layer w10: v1(4660,3055) 4673.19,3041.81 4709.01,3041.81 4721.72,3029.09 4760.91,3029.09 4775.31,3014.68 U4.2
  Bottom Layer w10: v1(4660,3055) 4638.19,3033.19 4638.19,2897.68 4724.45,2811.42 U1.20
GND: BATT.1 C1.1 C2.2 C3.2 C4.1 C5.1 C6.1 C7.1 C8.1 C9.1 C10.1 C11.1 C12.1 C13.1 C14.1 C16.1 C17.1 C18.1 C19.1 C20.1 C21.1 C22.1 C23.1 C24.2 C25.1 C26.2 C27.1 C28.1 C29.2 C30.1 C31.1 C32.2 C33.1 CHRG.1 D1.C D2.3 D4.3 D5.3 D6.3 JP3.GND JP3.MT1 R5.1 R12.1 R17.1 R19.1 RESET.3 RESET.4 U1.12 U1.18 U1.28 U1.31 U1.47 U1.63 U2.3 U2.4 U2.5 U3.2 U3.5 U3.6 U3.10 U3.15 U3.16 U3.17 U3.18 U3.25 U4.8 U4.14 U4.17 U4.20 U5.6 U5.9 U6.5 U6.9 U7.5 U7.9 U8.1 U8.2 U9.5 U9.9 U10.3 U10.4 U11.5 U11.9 Y1.2 Y2.2 | length 1309.9
  Top Layer w10: Y2.2@4622.5,2986.5 4622.5,2937.5 4651.09,2908.91 U4.8 ; U4.14@4775,2833.67 U4.14 4775.31,2809.68 4780,2805 ; U4.17 4865.02,2889.23 C12.1 C13.1 4910,2847.28 R12.1 ; U4.20 4857.02,2975.75 C11.1 ; U3.6 4993.01,2988.58 U3.5 ; U3.2 5056.89,2993.41 5056.89,3027.64 C9.1 ; v1(5185,2775) 5190.75,2780.75 C5.1
  Top Layer w20: v3(4615,3065) 4615,2994 Y2.2@4622.5,2986.5 ; 4690,2645 C17.1 ; 5137.68,3272.8 5137.68,3298.39
  Bottom Layer w10: v1(4750,3055) 4750,3060 4745,3065 C6.1 4749.4,3050.75 4772.19,3027.95 U1.31 ; U1.18 4852.95,2772.05 v1(4870,2755) ; U5.6 5000.16,3295.16 U5.9 ; v1(5069.25,3060) 5130,3060 5152.95,3082.95 U1.47 ; v1(5185,2775) 5187.95,2772.05 U1.63
  Bottom Layer w20: v2(4299.06,2864.57) 4350.43,2864.57 v3(4355,2860) ; v2(4299.06,2935.43) 4345.43,2935.43 v3(4355,2945) ; v1(4755,3260) 4761.38,3266.38 4786.38,3266.38 ; U8.2 U8.1 ; v2(5025,2169.06) v3(5025,2220) ; v3(5025,3575) v2(5025,3625.94) ; v1(5331.14,3095) v1@5335,3091.14
  other v1: 4870,1965 5185,2610 4815,2695 5960,2745 4910,2865 4480,2880 5025,2900 4565,2920 4875,3005 4090,3055 5215,3075 5015,3315 5130,3355 5185,3825
  other v2: 4989.57,2050.94 5025,2050.94 5060.43,2050.94 4989.57,2090.32 5025,2090.32 5060.43,2090.32 4989.57,2129.68 5025,2129.68 5060.43,2129.68 4989.57,2169.06 5060.43,2169.06 4180.94,2864.57 4220.31,2864.57 4259.69,2864.57 5750.94,2864.57 5790.31,2864.57 5829.69,2864.57 5869.06,2864.57 4180.94,2900 4220.31,2900 4259.69,2900 4299.06,2900 5750.94,2900 5790.31,2900 5829.69,2900 5869.06,2900 4180.94,2935.43 4220.31,2935.43 4259.69,2935.43 5750.94,2935.43 5790.31,2935.43 5829.69,2935.43 5869.06,2935.43 4989.57,3625.94 5060.43,3625.94 4989.57,3665.32 5025,3665.32 5060.43,3665.32 4989.57,3704.68 5025,3704.68 5060.43,3704.68 4989.57,3744.06 5025,3744.06 5060.43,3744.06
  other v3: 4980,2380 5230,2395 5385,2750 5560,2880 5685,2885 5530,3085 5025,3470
IRQ: U1.25 U4.6 | length 156.7
  Top Layer w10: U4.6 4716.95,2948.28 4739.33,2925.91 v1(4734.09,2925.91)
  Bottom Layer w10: v1@4734.09,2929.05 v1(4734.09,2925.91) v1@4738.58,2925.91 ; v1@4739.53,2926.85 v1@4738.58,2925.91 ; U1.25 4759.29,2909.84 4743.23,2925.91 v1@4738.58,2925.91
LED: D6.4 U1.10 | length 1298.4
  Top Layer w10: D6.4@4177,2983 D6.4 4219,2960 4277.07,2960 4278.47,2958.59 4311.41,2958.59 4324.09,2945.91 4324.09,2930.91 4340.91,2914.09 4404.09,2914.09 v1(4435,2945) ; v1(4755,2496.84) 4781.84,2470 4855,2470 4984.55,2599.55 4984.55,2624.55 v1(4985,2625)
  Bottom Layer w10: v1(4435,2945) 4435,2816.84 v1(4755,2496.84) ; v1(4985,2625) 4988.19,2625 4995.47,2632.28 U1.10
MISO: U1.22 U4.5 | length 258.5
  Top Layer w10: v1(4680,2980) 4680,2982.68 4681.16,2983.84 U4.5
  Bottom Layer w10: v1(4680,2980) 4680,2913.36 4742.58,2850.79 U1.22
MOSI: U1.23 U4.4 | length 186.7
  Top Layer w10: U4.4 4735.94,2966.65 4760,2942.59 4760,2910 v1(4740,2890)
  Bottom Layer w10: v1(4740,2890) 4759.53,2870.47 U1.23
NetC2_1: C2.1 U1.5 Y1.1 | length 342.3
  Bottom Layer w10: U1.5 5093.9,2604.32 5070,2580.42 5070,2509 5091.5,2487.5 Y1.1@5101.5,2487.5 ; Y1.1@5111.5,2487.5 5126.5,2472.5 Y1.1@5148.25,2472.5 ; Y1.1 5138.25,2462.5 Y1.1@5148.25,2472.5 ; C2.1@5180,2505 C2.1 Y1.1@5148.25,2472.5
NetC3_1: C3.1 U1.6 Y1.3 | length 279
  Bottom Layer w10: C3.1 4926.75,2530.75 4953.5,2557.5 4986.64,2557.5 5012.33,2583.19 5048.19,2583.19 5074.21,2609.21 U1.6
NetC6_2: C6.2 U1.30 | length 66
  Bottom Layer w10: C6.2 4755.98,3008.27 U1.30
NetC10_2: C10.2 RESET.1 RESET.2 U1.7 | length 569.1
  Top Layer w10: v1(4865,2590) 4903.5,2628.5 RESET.2 4933.5,2628.5 4962.72,2657.72 5076.5,2657.72 RESET.1
  Bottom Layer w10: v1(4865,2590) 4894.25,2590 4903.35,2599.09 5039.09,2599.09 5054.53,2614.53 U1.7
NetC11_2: C11.2 U4.19 | length 51.9
  Top Layer w10: U4.19 4848.6,2928.6 4864.25,2944.25 C11.2
NetC14_2: C14.2 U3.9 | length 59.6
  Top Layer w10: C14.2 4930.39,2944.25 4945.12,2929.53 U3.9
NetC15_1: C15.1 L1.2 | length 34.6
  Top Layer w10: C15.1 L1.2@4770,2710.31
NetC17_2: C17.2 C18.2 L3.2 U4.11 | length 169.1
  Top Layer w10: C18.2 C17.2 4690.31,2711.06 L3.2 4690.31,2808.04 U4.11
NetC19_2: C19.2 U4.9 Y2.1 | length 256.9
  Top Layer w10: C19.2 4527.5,3033.25 Y2.1 4538.5,2986.5 4635.77,2889.23 U4.9
NetC20_2: C20.2 U4.10 Y2.3 | length 142.7
  Top Layer w10: C20.2 4622.5,2781.75 Y2.3 4668.54,2869.54 U4.10
NetC24_1: C24.1 U6.2 | length 81.5
  Bottom Layer w10: C24.1@4870.75,3660 C24.1 4936.26,3659.25 U6.2
NetC26_1: C26.1 U7.2 | length 81.9
  Bottom Layer w10: C26.1@5785,3054.51 C26.1 5786.14,2986.85 U7.2
NetC27_2: C27.2 D7.1 R15.2 R16.2 U10.7 | length 576.1
  Top Layer w10: U10.7@4967.32,3237.2 5019.43,3237.2 5045.91,3210.73 5045.91,3168.35 R16.2 ; R15.2 5155.91,3381.38 5155.91,3359.09 5195,3320 v3(5195,3245)
  Top Layer w20: R16.2 5028.31,3150.75 C27.2 5150.75,3150.75 5195,3195 v3(5195,3245)
NetC29_1: C29.1 U9.2 | length 86.5
  Bottom Layer w10: U9.2 5113.74,2135.75 C29.1 C29.1@5184.25,2135
NetC32_1: C32.1 U11.2 | length 80.3
  Bottom Layer w10: U11.2 4263.86,2813.15 C32.1
NetD1_A: D1.A R13.1 | length 98.3
  Top Layer w10: D1.A@5101.77,2497.72 D1.A 5101.77,2462.28 R13.1
NetD2_4: D2.4 D4.2 | length 1028.6
  Top Layer w10: D2.4 5127,3697.09 5174.09,3650 5174.09,3531.34 5671.34,3034.09 5714.37,3034.09 D4.2
NetD3_A: D3.A R15.1 | length 96.9
  Top Layer w10: D3.A@5080,3385.94 5080,3410.94 5094.06,3425 5142.28,3425 R15.1
NetD3_C: D3.C U10.2 | length 253.9
  Top Layer w10: D3.C 5041.09,3328.91 5041.09,3302.28 5107.47,3235.91 5131.38,3235.91 U10.2@5132.68,3237.2
NetD4_4: D4.4 D5.2 | length 1036.5
  Top Layer w10: D5.2 5126.46,2226.02 5655.03,2754.59 5777.91,2754.59 5821.32,2798 D4.4
NetD5_4: D5.4 D6.2 | length 1036.7
  Top Layer w10: D6.2 4351.46,2798.54 4879.59,2270.41 4879.59,2148.47 4923,2105.07 D5.4
NetL1_1: L1.1 L2.1 U4.13 | length 90.3
  Top Layer w10: U4.13 4755.63,2799.05 4769.69,2785 4770,2784.68 L1.1@4770,2749.68
NetL2_2: L2.2 L3.1 U4.12 | length 91.6
  Top Layer w10: L3.1 4729.69,2784.37 4730.31,2785 4735.94,2790.63 U4.12
NetQ1_1: Q1.1 U10.6 | length 194.4
  Top Layer w10: Q1.1@4832.6,3145.63 4850.16,3145.63 4920,3215.47 4920,3234.56 4948.23,3262.8 U10.6@4967.32,3262.8
NetQ1_3: Q1.3 R16.1 U10.8 | length 116.4
  Top Layer w10: U10.8@4967.32,3211.61 4967.44,3211.5 R16.1
  Top Layer w20: Q1.3 4918.63,3145 R16.1
NetR1_2: R1.2 U1.44 | length 168.7
  Bottom Layer w10: U1.44 5093.9,3158.9 5130,3195 R1.2
NetR2_2: R2.2 U1.45 | length 139.7
  Bottom Layer w10: U1.45 5113.58,3153.58 5130,3170 5197.28,3170 R2.2
NetR3_1: R3.1 U1.37 U11.1 | length 974.3
  Bottom Layer w10: U11.1 4371.26,2821.26 4393.19,2843.19 4393.19,3057.74 4445.65,3110.21 4446.29,3110.21 4449.8,3113.72 4768.73,3113.72 4771.82,3116.81 4825.75,3116.81 4870.4,3072.17 4943.38,3072.17 4956.1,3084.89 U1.37
NetR4_1: R4.1 U1.38 U9.1 | length 1947.5
  Bottom Layer w10: U1.38 4975.79,3082.08 4949.97,3056.26 4863.81,3056.26 4819.17,3100.91 4778.41,3100.91 4775.32,3097.81 4515.77,3097.81 4505.68,3087.72 4446.29,3087.72 4409.09,3050.52 4409.09,2700.91 4850,2260 5043.5,2260 5103.74,2199.76 U9.1
NetR5_2: BOOT.1 BOOT.2 R5.2 U1.60 | length 267.1
  Top Layer w10: BOOT.2 5339.09,2826.69 5339.09,2980.71 BOOT.1
  Bottom Layer w10: U1.60 5286.61,2831.1 5307.72,2810 v1(5330,2810)
NetR6_2: R6.2 U1.39 U6.1 | length 1182.4
  Bottom Layer w10: U6.1 4946.26,3636.26 4532.72,3222.72 4532.72,3152.28 4555.38,3129.62 4762.14,3129.62 4765.24,3132.72 4838.27,3132.72 4844.5,3138.94 4870.4,3164.84 4982.75,3164.84 4995.47,3152.12 U1.39
NetR7_2: R7.2 U1.40 U7.1 | length 2201
  Bottom Layer w10: U1.40 5015.16,3164.78 4999.19,3180.75 4863.81,3180.75 4831.68,3148.62 4758.65,3148.62 4755.55,3145.53 4574.47,3145.53 4561.01,3158.99 4561.01,3228.52 4852.49,3520 5197.9,3520 5578.88,3139.02 5578.88,3040.65 5609.53,3010 5731.5,3010 U7.1
NetR8_1: R8.1 U3.11 | length 117.5
  Top Layer w10: R8.1 4920,2810 4942.24,2832.24 4942.24,2880.9 4951.51,2890.16 U3.11
NetR9_1: R9.1 U3.4 | length 95.8
  Top Layer w10: R9.1 4962.72,3027.76 4979.27,3011.21 5005,3011.21 5015.16,3001.05 U3.4
NetR12_2: R12.2 U4.16 | length 52.9
  Top Layer w10: U4.16 4854.1,2845 R12.2
NetR17_2: R17.2 U10.5 | length 56.9
  Top Layer w10: R17.2 4926.1,3288.39 U10.5@4967.32,3288.39
NetR18_1: R18.1 R19.2 U1.8 | length 411.1
  Top Layer w10: R19.2 R18.1 5045,2409.28 5025,2429.28 v1(5025,2625)
  Bottom Layer w10: v1(5025,2625) 5034.84,2634.84 U1.8
NetU1_14: U1.14 U6.8 | length 2422.3
  Top Layer w10: v1(5618.88,3037.29) 5619.07,3037.47 v1(5619.07,2981.92)
  Bottom Layer w10: U1.14 4916.73,2644.23 4891.76,2619.25 4857.62,2619.25 4839.09,2600.73 4839.09,2445.91 4960,2325 5240,2325 5619.07,2704.07 v1(5619.07,2981.92) ; U6.8 5103.74,3636.66 5130.4,3610 5617.7,3122.7 5618.88,3121.52 v1(5618.88,3037.29)
NetU1_15: U1.15 U7.8 | length 1516.3
  Bottom Layer w10: U1.15 4897.05,2647.88 4884.33,2635.16 4870.4,2635.16 4870.28,2635.28 4840.28,2635.28 4823.19,2618.19 4823.19,2431.81 4955,2300 5237.49,2300 5758.75,2821.26 U7.8
NetU1_16: U1.16 U9.8 | length 628.4
  Top Layer w10: v1(4925,2230) v1(4925,2290)
  Bottom Layer w10: U1.16 4877.36,2664.86 4847.36,2664.86 4807.28,2624.78 4807.28,2407.72 v1(4925,2290) ; v1(4925,2230) 4946.26,2208.74 U9.8
NetU1_17: U1.17 U11.8 | length 660.6
  Top Layer w10: v1(4360,3020) 4425,3020 4430,3025 v1(4435,3020)
  Bottom Layer w10: U11.8 4306.73,2978.74 4347.99,3020 v1(4360,3020) ; v1(4435,3020) 4435,3004.28 4686.91,2752.36 U1.17
NetU1_26: U1.26 U8.6 | length 646.8
  Top Layer w10: v1(4697.95,3070.91) 4785,3157.95 4785,3270 v1(4755,3300) 4755,3314.75 4755.25,3315
  Bottom Layer w10: v1@4700,3072.95 v1(4697.95,3070.91) 4705,3063.86 4705,2994.6 4770.07,2929.53 U1.26 ; v1(4755,3300) 4755,3310.11 4766.49,3298.62 4846.33,3298.62 4867.4,3319.7 U8.6
SCK: U1.21 U4.3 | length 425.2
  Top Layer w10: v1(4679.09,3015.91) 4676.34,3015.91 4673.62,3013.19 4746.81,3013.19 4755.63,3004.37 U4.3
  Bottom Layer w10: v1(4679.09,3015.91) 4665.91,3015.91 4654.09,3004.09 4654.09,2904.27 4727.26,2831.1 U1.21
SCL: R11.2 U1.58 U2.8 U3.19 | length 506.2
  Top Layer w10: v1(5045,2745) 5047.72,2747.72 R11.2 5054.53,2766.81 U3.19
  Bottom Layer w10: v1(5045,2745) 5170.47,2870.47 U1.58 5277.12,2870.47 5299.09,2892.45 5299.09,2941.22 U2.8
SDA: R10.2 U1.59 U2.7 U3.20 | length 435
  Top Layer w10: v1(5085,2745) 5082.28,2747.72 R10.2 5086.52,2764.23 U3.20
  Bottom Layer w10: v1(5085,2745) 5190.79,2850.79 U1.59 5285.79,2850.79 5315,2880 5315,2907.91 U2.7
U1: pad.@4931.21,3870.49 U6.3 | length 209.6
  Bottom Layer w20: pad.@4931.21,3870.49 4905,3844.28 4905,3721.71 4925.96,3700.75 U6.3
U2: pad.@5995,2995 U7.3 | length 208.6
  Bottom Layer w20: U7.3 5825.75,2999.04 5846.71,3020 5970,3020 pad.@5995,2995
U3: pad.@5120,1935 U9.3 | length 198.6
  Bottom Layer w20: U9.3 5124.04,2094.25 5145,2073.29 5145,1960 pad.@5120,1935
U4: pad.@4055.49,2806.21 U11.3 | length 208.6
  Bottom Layer w20: pad.@4055.49,2806.21 4081.7,2780 4203.29,2780 4224.15,2800.85 4224.15,2821.15 U11.3
USB_DM: JP3.D- R1.1 | length 127.5
  Top Layer w10: JP3.D- 5325,3193.81 v1(5325,3195)
  Bottom Layer w10: R1.1 v1(5325,3195)
USB_DP: JP3.D+ R2.1 | length 50.6
  Top Layer w10: v1(5240,3145) JP3.D+
V1: pad.@5025,3870 U6.4 | length 166.2
  Bottom Layer w20: U6.4 4946.26,3791.26 5015,3860 pad.@5025,3860
V2: pad.@5995,2900 U7.4 | length 170.4
  Bottom Layer w20: U7.4 5916.26,2978.74 pad.@5995,2900
V3: pad.@5025,1935 U9.4 | length 156.2
  Bottom Layer w20: pad.@5025,1945 5035,1945 5103.74,2013.74 U9.4
V4: pad.@4055,2900 U11.4 | length 170.4
  Bottom Layer w20: pad.@4055,2900 4133.74,2821.26 U11.4
VCC: BOOT.3 BOOT.4 C1.2 C7.2 C8.2 C9.2 C12.2 C13.2 C21.2 C33.2 R3.2 R4.2 R6.1 R7.1 R8.2 R9.2 R10.1 R11.1 R13.2 U1.1 U1.13 U1.19 U1.32 U1.48 U1.64 U2.1 U2.2 U3.3 U3.28 U4.7 U4.15 U4.18 U5.1 U5.2 U5.3 U8.3 | length 4329.8
  Top Layer w10: v1(4485,3050) 4496.12,3061.12 4495,3062.24 4500,3067.24 v1(4500,3145) 4500,3150 4525,3175 v1(4595,3175) ; 4697.9,2928.6 4708.19,2918.3 4708.19,2885.18 4729.27,2864.09 4767.55,2864.09 4795,2891.55 ; U4.15 4795,2891.55 ; C13.2 C12.2 4873.16,2908.91 U4.18 4812.36,2908.91 4795,2891.55 ; C7.2@5034.84,3035 U3.3 5034.84,2980.16 5046.1,2968.9 U3.28 5098.49,2968.9 5107.76,2978.16 5107.76,3047.01 C9.2 C8.2 C8.2@5144.25,3045.6 ; R10.1 5128.62,2749.09 5213.31,2749.09 5235,2770.79 ; C8.2@5149.93,3039.93 C8.2@5144.25,3045.6 ; R13.2 5177.72,2497.72 v1(5235,2555) ; v1(5235,2695) 5235,2770.79 ; v1(5390,3045) 5288.94,3045 5286.42,3042.48 ; C8.2@5144.25,3045.6 5144.25,3054.4 5190.76,3100.91 5227.99,3100.91 5286.42,3042.48 ; 5235,2770.79 BOOT.4 5286.42,2822.2 5286.42,3042.48
  Top Layer w15: v1(4930,3030) 4927.28,3032.72 R9.2 4927.28,3053.21 4995.37,3121.3 4995.37,3168.27 5020,3192.9 v1(5020,3200)
  Bottom Layer w10: R3.2 4497.28,3147.72 v1(4500,3145) 4499.57,3145 4497.28,3147.28 R6.1 ; v1(4595,3175) 4607.41,3162.59 4750.13,3162.59 4787.53,3200 ; U8.3@4792.6,3244.23 U8.3 4792.6,3205.07 4787.53,3200 ; U1.19 4866.73,2791.73 v1(4870,2795) ; U1.32 4840.11,3047.64 4852.75,3035 4930,3035 4920,3025 v1(4920,2913.11) 4945,2888.11 4945,2835 4905,2795 v1(4870,2795) ; v1(4930,3030) v1(5140,3030) 5140,3045.72 5172.64,3078.36 U1.48 5235.75,3118.5 C1.2 ; U1.13 4936.42,2728.58 4905,2760 ; v1(4995,2760) 4905,2760 ; v1(5020,3200) 4787.53,3200 ; U5.3 U5.2 U5.1 ; U1.1 5221.5,2681.5 v1(5235,2695) ; v1(5235,2555) v1(5235,2695) ; U1.64 5243.5,2703.5 v1(5235,2695) ; C33.2 5370.75,3064.25 v1(5390,3045) 5390,3042.13 U2.1 U2.2 ; v1(4870,2795) 4905,2760
  Bottom Layer w15: v1(5020,3200) 5052.43,3200 5066.16,3186.27 5093.84,3186.27 5138.64,3231.07 5138.64,3301.36 5125,3315 5110.75,3315 C21.2
  Bottom Layer w20: 5075.75,3325.75 5100,3325.75 C21.2
VDD: C22.2 C23.2 C25.2 C28.2 C30.2 C31.2 D2.1 D4.1 D5.1 D6.1 Q1.2 R14.1 R18.2 U5.5 U5.7 U5.8 U6.7 U7.7 U8.5 U9.7 U10.1 U11.7 | length 7792.5
  Top Layer w10: R18.2 5083.05,2249.23 5083.05,2142.09 5115.14,2110 5180,2110 ; v3(5080,3219.67) 5066.44,3219.67 5066.44,3218.01 5072.84,3211.61 U10.1@5132.68,3211.61
  Top Layer w20: C31.2 4150,3055 ; D6.1 4177,2747 4175,2745 ; 4855,3748 D2.1 ; C28.2 4870,2025 ; Q1.2 4880,3268.86 4869.61,3279.25 4855.75,3279.25 4840,3295 4840,3365 v3(4850,3375) ; D5.1 5178,2047 5180,2045 ; D4.1 5873,3053 5875,3055 ; C25.2 5898.62,2745 ; 4150,3055 4115,3020 4115,2775 4145,2745 4175,2745 ; 4150,3055 v3(4235,3055) 4366.29,3055 4686.29,3375 v3(4850,3375) ; 4175,2745 4375,2745 4858.69,2261.31 4858.69,2116.31 v3(4870,2105) 4870,2025 ; v3(4850,3375) 4854.48,3379.48 4854.48,3759.48 4905,3810 5140,3810 5185,3765 v3(5185,3695) 5190,3695 5195,3690 5195,3540 5680,3055 5875,3055 ; 4870,2025 4900,1995 5150,1995 5180,2025 5180,2045 ; 5180,2045 5180,2250 5660,2730 5798.62,2730 v3(5811.81,2743.19) 5896.81,2743.19 5898.62,2745 ; 5875,3055 5895,3055 5935,3015 5935,2781.38 5898.62,2745
  Bottom Layer w10: U8.5 4830,3355 v3(4850,3375) ; C22.2@4905,3365 4905,3242.6 4921.7,3225.91 5030.73,3225.91 5036.96,3219.67 v3(5080,3219.67) ; U9.7@4931.5,2125.75 U9.7 ; 4954.76,3325 4955.08,3324.69 U5.7 4936.7,3314.84 4926.46,3304.6 4926.46,3283.54 4934.53,3275.47 U5.5
  Bottom Layer w20: v3(4235,3055) 4255.75,3034.25 4255.75,3005 U11.7 ; v3(4850,3375) 4850,3365 C22.2@4905,3365 ; v3(4870,2105) 4890.75,2125.75 U9.7@4931.5,2125.75 ; C22.2 4924.25,3350 4924.25,3335.75 4935,3325 4954.76,3325 ; U6.7 5154.25,3669.25 5180,3695 v3(5185,3695) ; U7.7 5794.25,2760.75 v3(5811.81,2743.19)
W1: pad.@5120,3870 U6.6 | length 208.6
  Bottom Layer w20: U6.6 5124.04,3700.75 5145,3721.71 5145,3845 pad.@5120,3870
W2: pad.@5995.49,2806.21 U7.6 | length 206.1
  Bottom Layer w20: U7.6 5825.75,2794.25 5840,2780 5969.28,2780 5977.5,2788.22 pad.@5977.5,2806.21
W3: pad.@4931.21,1935.49 U9.6 | length 193.5
  Bottom Layer w20: pad.@4933.11,1952.36 4914.33,1952.36 4905,1961.7 4905,2073.29 4925.96,2094.25 U9.6
W4: pad.@4055,2995 U11.6 | length 209.6
  Bottom Layer w20: pad.@4055,2995 4080,3020 4205,3020 4224.25,3000.75 U11.6
XIN: C4.2 U3.27 Y3.1 | length 150.8
  Top Layer w10: U3.27 5180,2949.21 5164.25,2964.96 C4.2
XOUT: C5.2 U3.26 Y3.2 | length 185.5
  Top Layer w10: U3.26 5101.26,2929.53 5180,2850.79 5159.25,2830.04 C5.2
pads on no net: D2.2 JP3.ID JP3.MT2 JP3.P$1 JP3.P$2 U1.2 U1.3 U1.4 U1.9 U1.11 U1.24 U1.29 U1.33 U1.34 U1.35 U1.36 U1.41 U1.42 U1.43 U1.46 U1.49 U1.50 U1.51 U1.52 U1.53 U1.54 U1.55 U1.56 U1.57 U1.61 U1.62 U2.6 U3.1 U3.7 U3.8 U3.12 U3.13 U3.14 U3.21 U3.22 U3.23 U3.24 U5.4

## Polygon pours and split planes (outlines as drawn)
GND on Top Layer "GND_L01_P000" (solid, remove dead copper, pour order 0): 3450,4685 3585,4820 6205,4820 6345,4820 6720,4445 6775,4390 6775,1750 6775,1440 6535,1200 6485,1150 3915,1150 3540,1150 3290,1500 3290,4480 3290,4525
GND on Bottom Layer "GND_L02_P004" (solid, remove dead copper, pour order 4): 6600,4685 6465,4820 3845,4820 3705,4820 3330,4445 3275,4390 3275,1750 3275,1440 3515,1200 3565,1150 6135,1150 6510,1150 6760,1500 6760,4480 6760,4525

## Keep-outs
Keep-Out Layer:
  circle w0.5: c5025,4275 r100
  circle w0.5: c5150.27,4149.73 r43.31
  circle w0.5: c4899.73,4400.27 r43.31
  circle w0.5: c5150.27,4400.27 r43.31
  circle w0.5: c4899.73,4149.73 r43.31
  circle w0.5: c3524.73,3025.27 r43.31
  circle w0.5: c3524.73,2774.73 r43.31
  circle w0.5: c3775.27,3025.27 r43.31
  circle w0.5: c3650,2900 r100
  circle w0.5: c3775.27,2774.73 r43.31
  circle w0.5: c4899.73,1399.73 r43.31
  circle w0.5: c5150.27,1399.73 r43.31
  circle w0.5: c4899.73,1650.27 r43.31
  circle w0.5: c5025,1525 r100
  circle w0.5: c5150.27,1650.27 r43.31
  circle w0.5: c6525.27,2774.73 r43.31
  circle w0.5: c6525.27,3025.27 r43.31
  circle w0.5: c6274.73,2774.73 r43.31
  circle w0.5: c6400,2900 r100
  circle w0.5: c6274.73,3025.27 r43.31
  lines w0.5: 3777.57,2655.71 cw(c3650,2900) 3777.57,3144.29 ccw(c4009,3587.5) 4009,3087.5 4267.23,3087.5 ccw(c4267.23,3337.5) 4483.73,3212.5 cw(c5025,2900) 4712.5,3441.27 ccw(c4587.5,3657.77) 4837.5,3657.77 4837.5,3916 ccw(c4337.5,3916) 4780.71,4147.43 cw(c5025,4275) 5269.29,4147.43 ccw(c5712.5,3916) 5212.5,3916 5212.5,3657.77 ccw(c5462.5,3657.77) 5337.5,3441.27 cw(c5025,2900) 5566.27,3212.5 ccw(c5782.77,3337.5) 5782.77,3087.5 6041,3087.5 ccw(c6041,3587.5) 6272.43,3144.29 cw(c6400,2900) 6272.43,2655.71 ccw(c6041,2212.5) 6041,2712.5 5782.77,2712.5 ccw(c5782.77,2462.5) 5566.27,2587.5 cw(c5025,2900) 5337.5,2358.73 ccw(c5462.5,2142.23) 5212.5,2142.23 5212.5,1884 ccw(c5712.5,1884) 5269.29,1652.57 cw(c5025,1525) 4780.71,1652.57 ccw(c4337.5,1884) 4837.5,1884 4837.5,2142.23 ccw(c4587.5,2142.23) 4712.5,2358.73 cw(c5025,2900) 4483.73,2587.5 ccw(c4267.23,2462.5) 4267.23,2712.5 4009,2712.5 ccw(c4009,2212.5) 3777.57,2655.71

## Silkscreen, mask and mechanical layers (free items; w line width, h text height)
Top Overlay:
  text "ANT" at 4715,2520 h40
Mechanical 1:
  lines w0.5: 5212.5,1964.22 5212.5,2142.23